# Altium PCB B202AA-PCIe.PcbDoc
Units mm, origin at the board's own origin, x right, y up, seen from the top; angles counter-clockwise.
Board outline 30 x 50.95 mm, 4 copper layers (Top Layer, Int1, Int2, Bottom Layer), stack 1.547 mm thick; 93 components, 58 nets, 313 pads, 104 vias.
Unrouted connection lines stored in the file: 238.
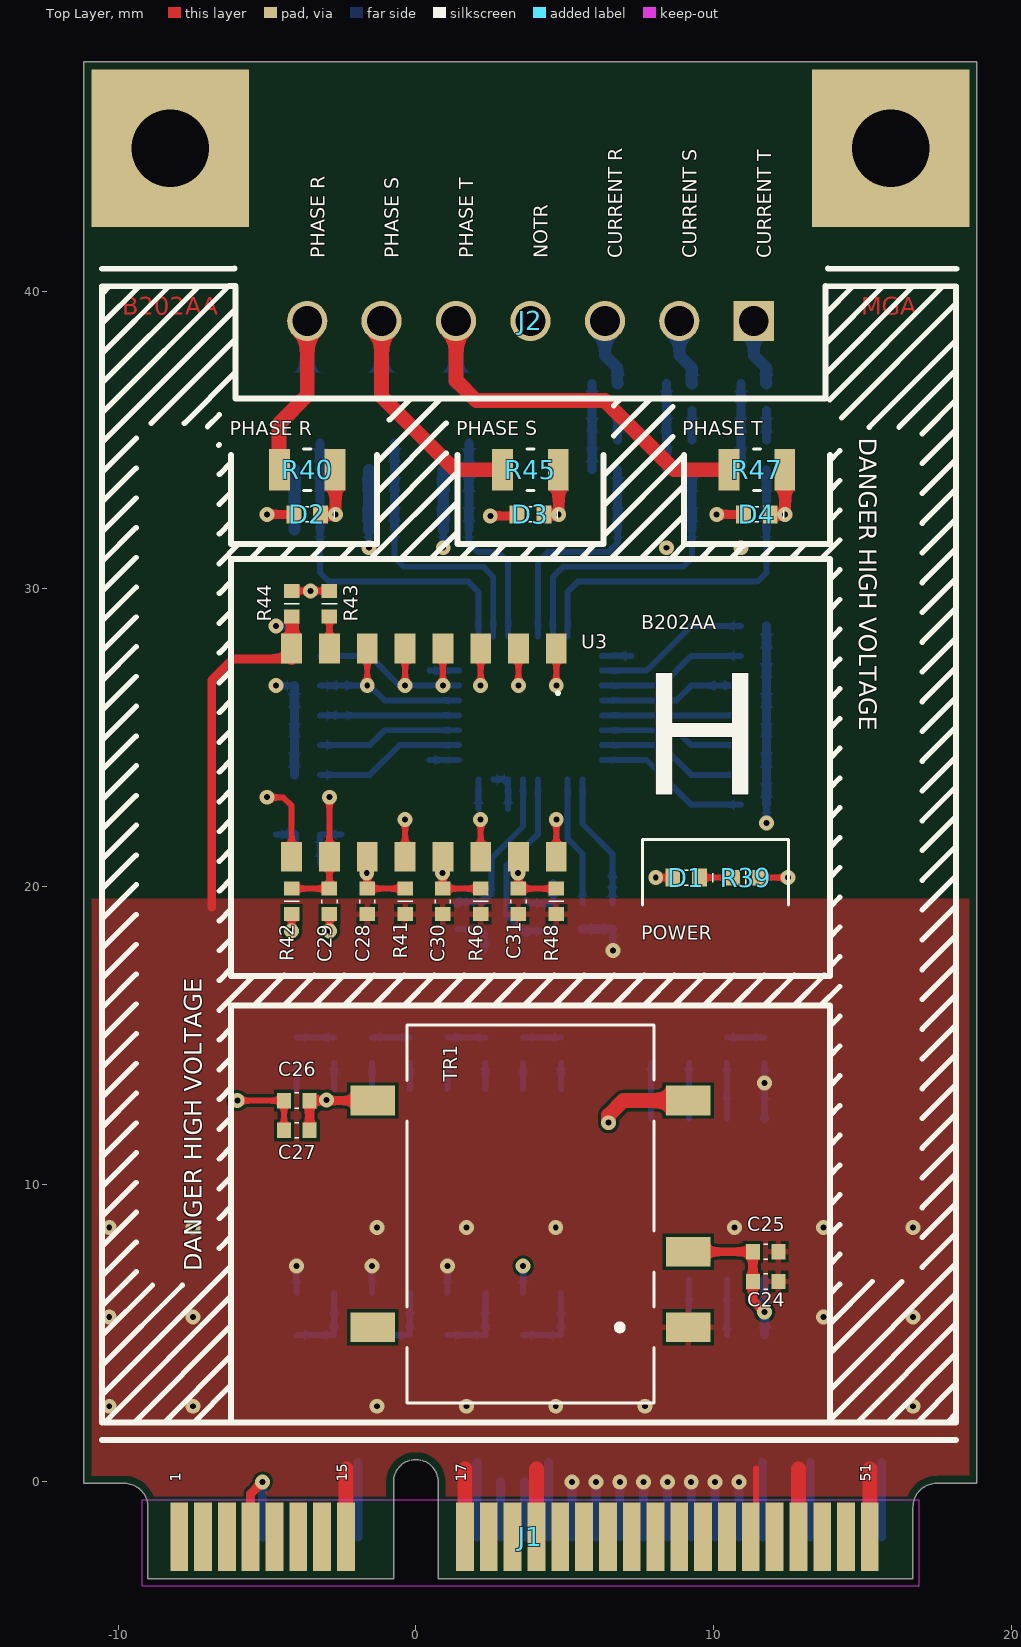
[diagram p0: Top Layer view]
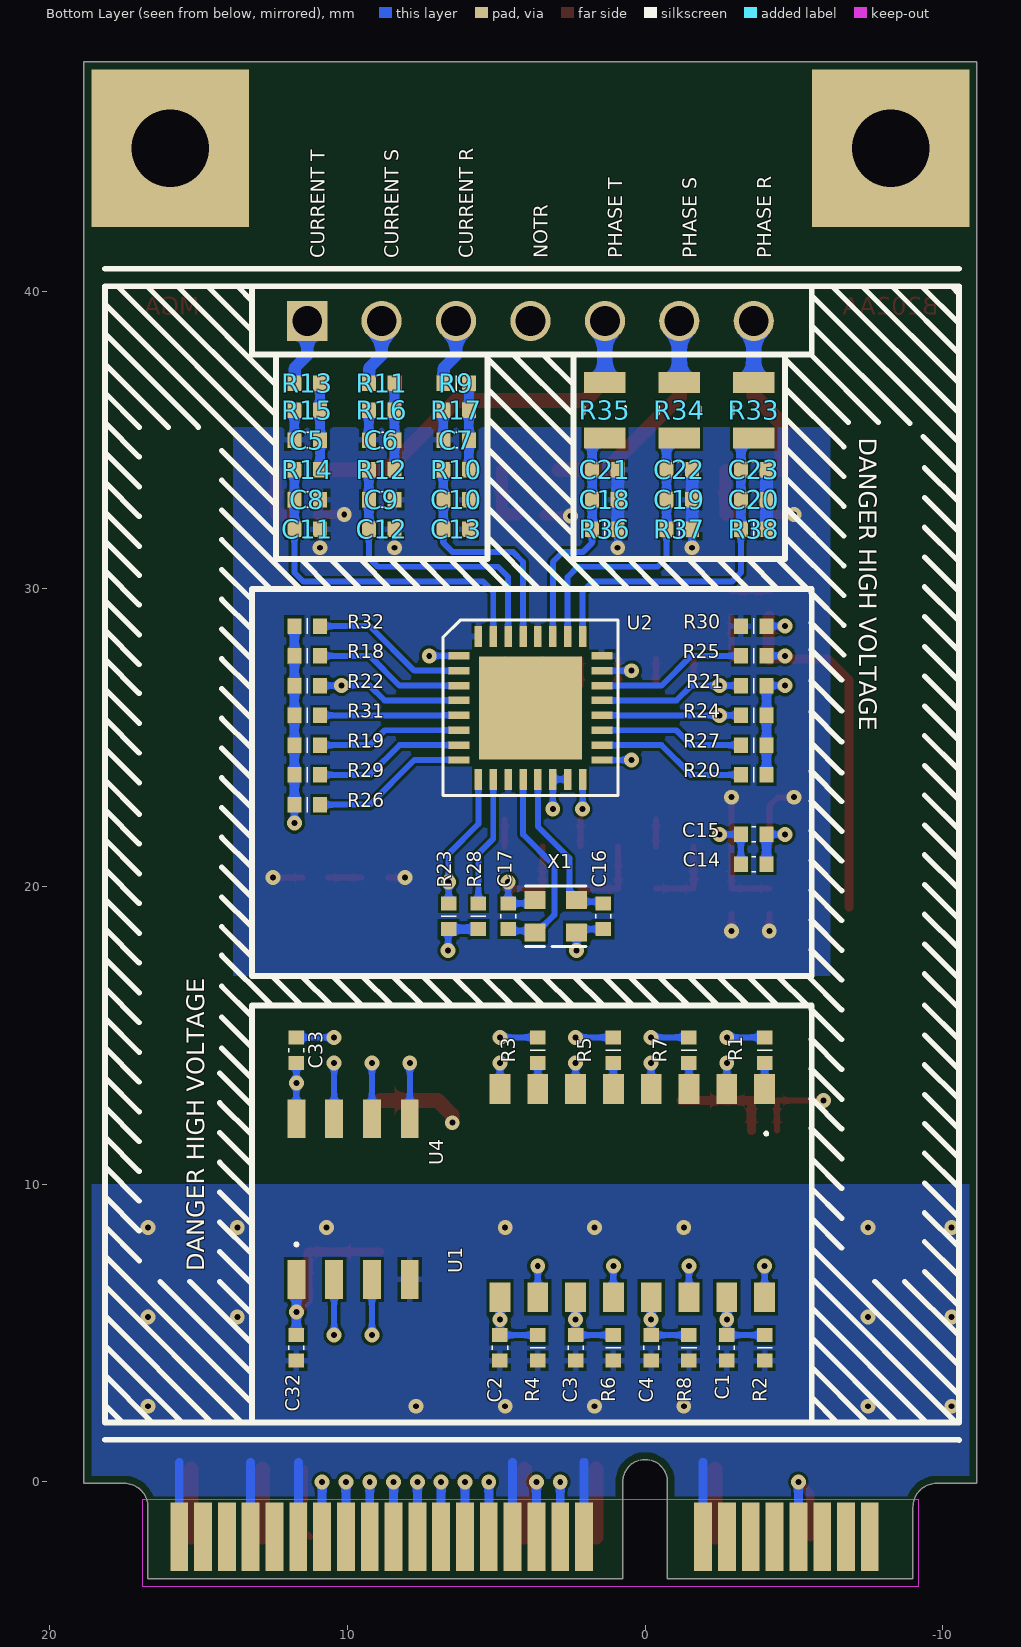
[diagram p1: Bottom Layer view, seen from below]
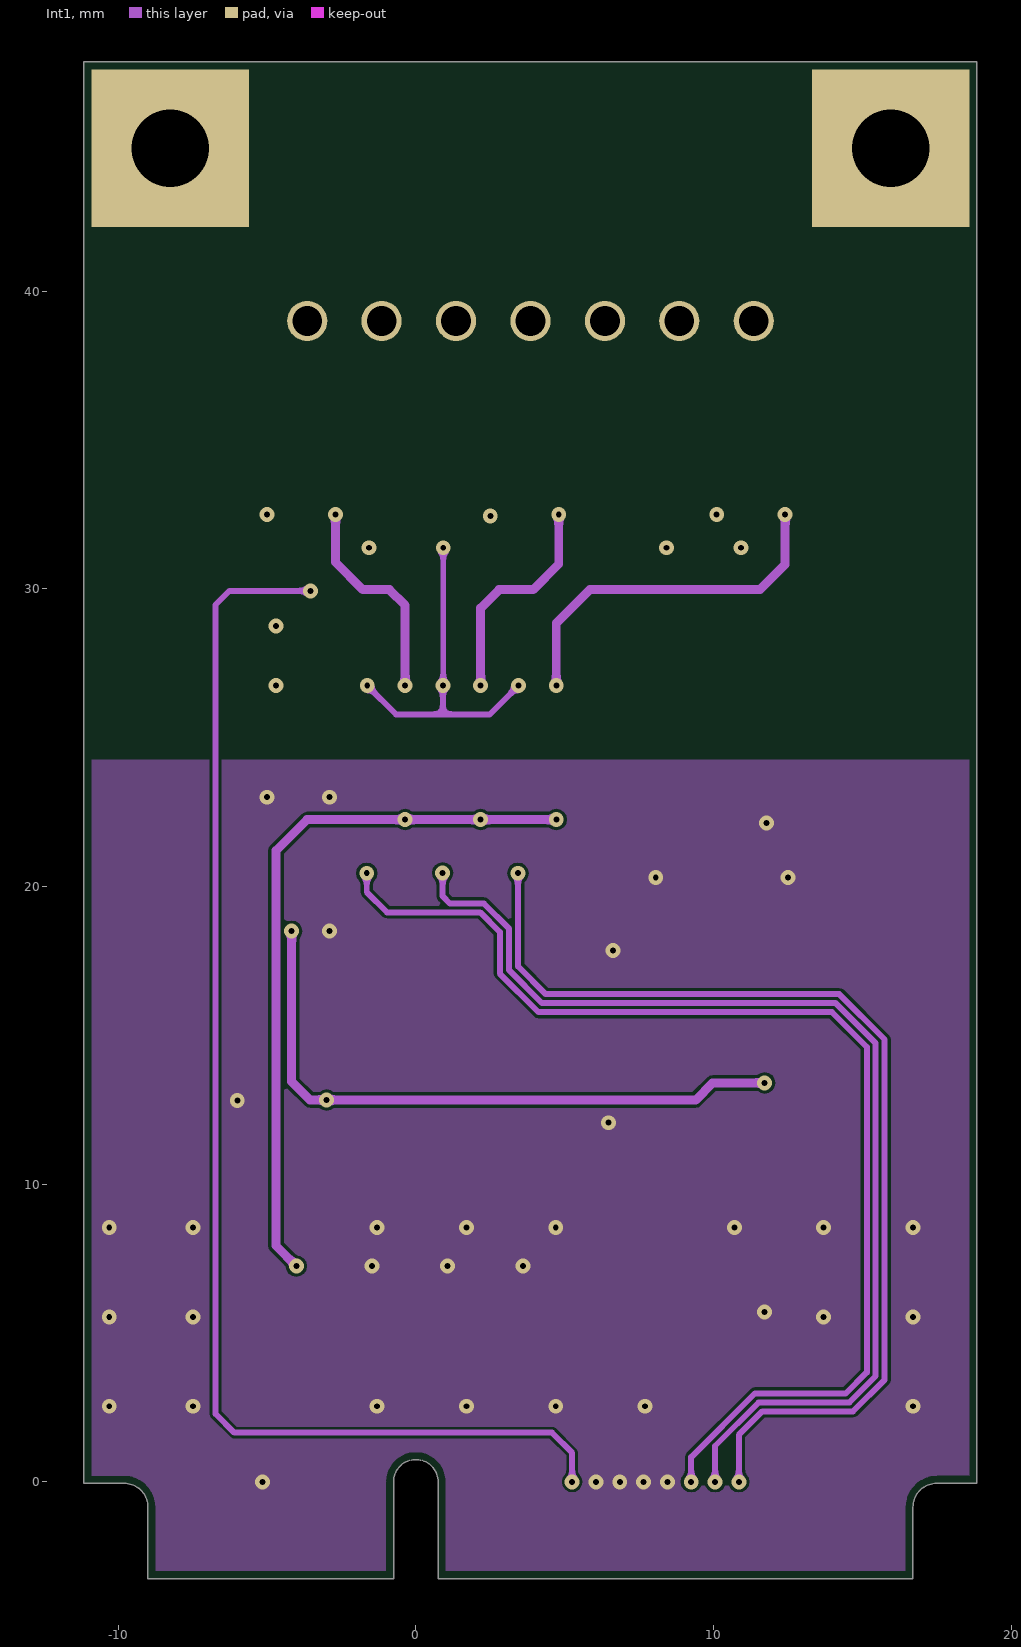
[diagram p2: Int1]
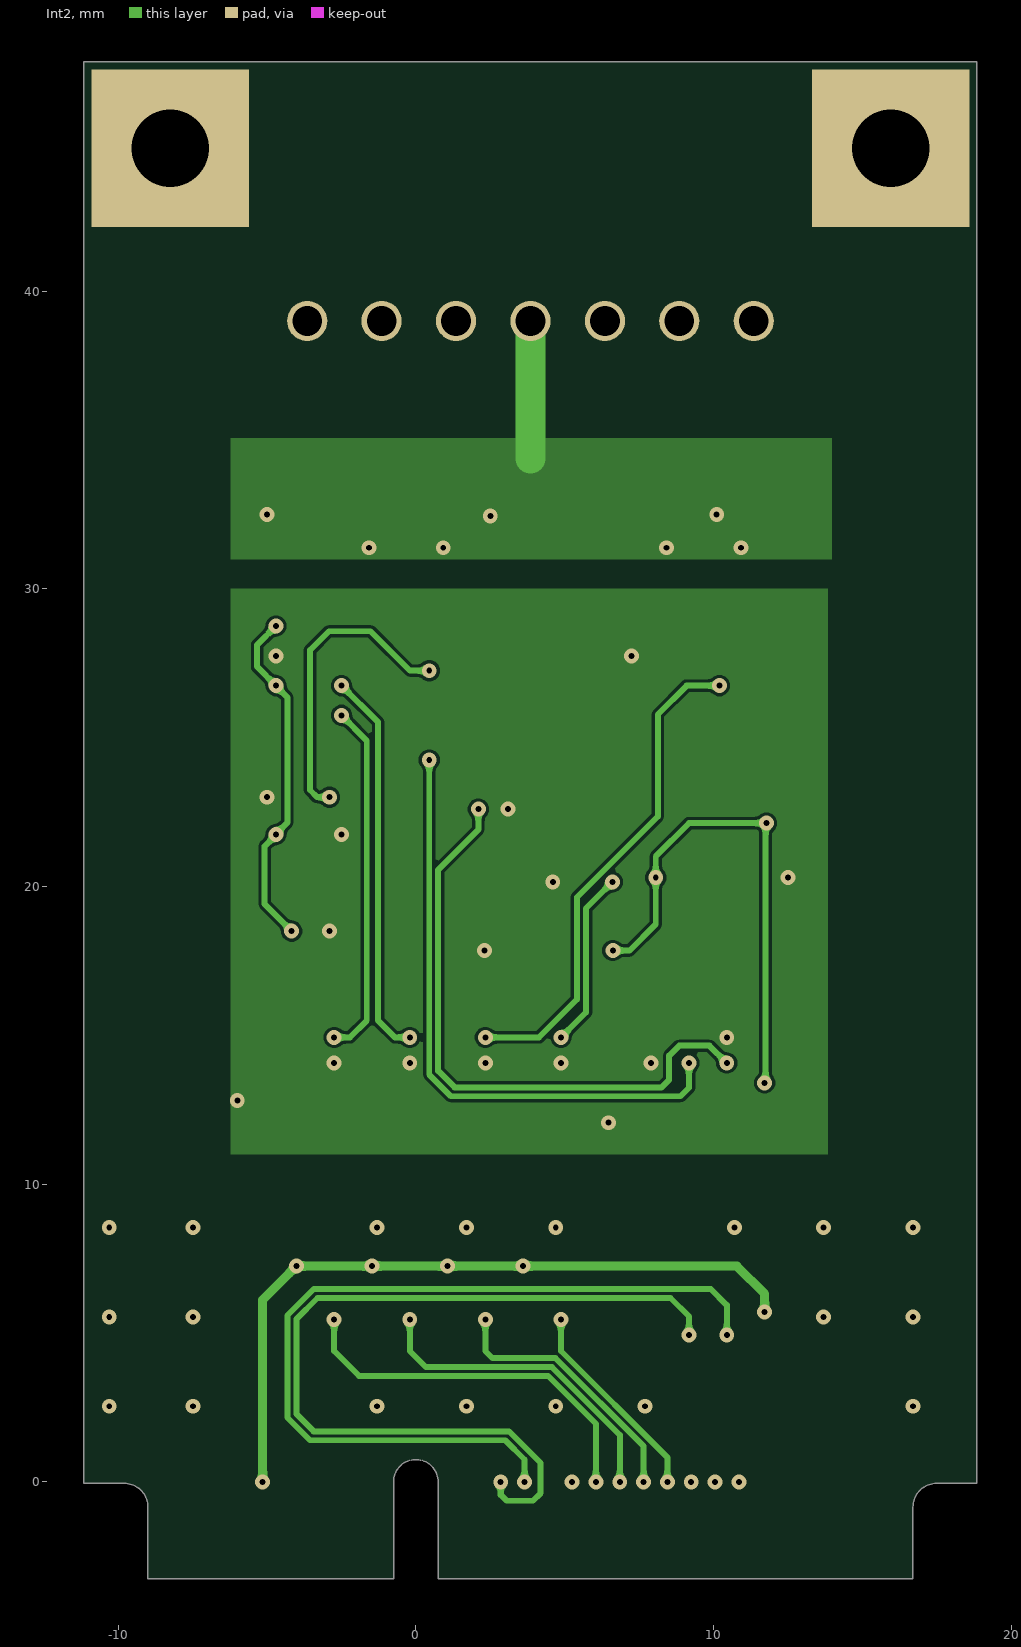
[diagram p3: Int2]
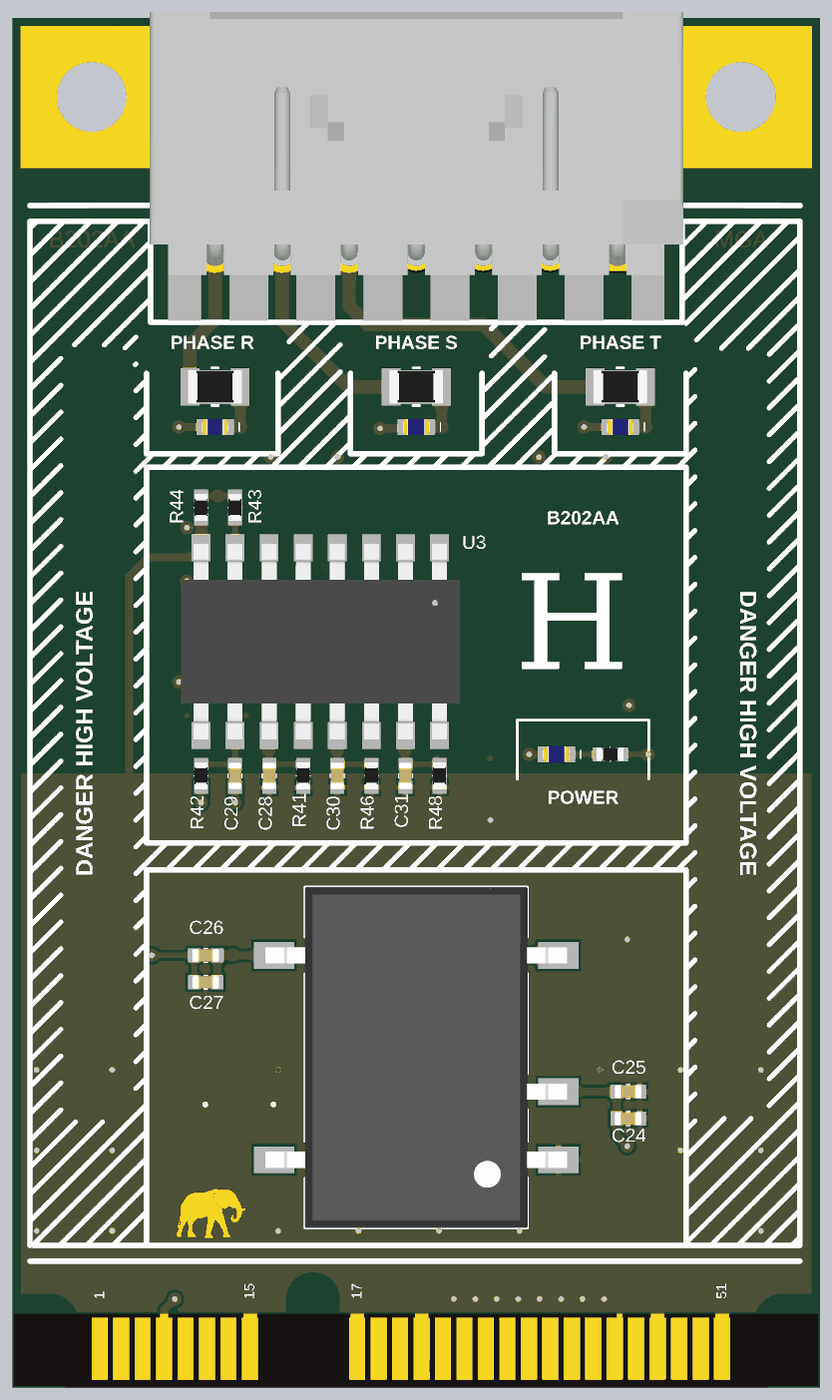
[diagram p4: 3D render of the assembled board from above, using the file's embedded part models]
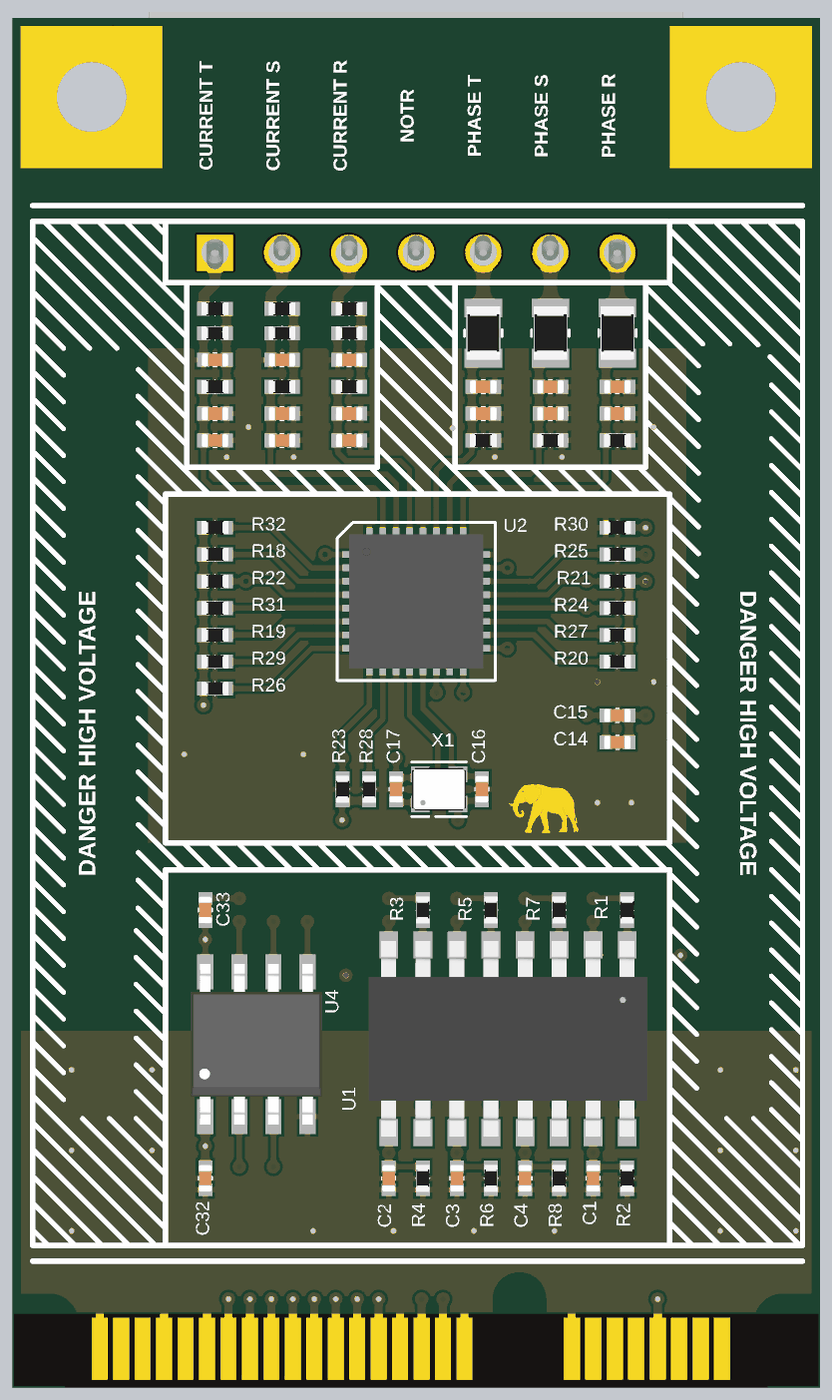
[diagram p5: 3D render of the assembled board from below, using the file's embedded part models]

## Layer stack, top to bottom
Top Solder: solder mask 0.0254, SM-001, Dk 4
Top Layer: signal copper 0.035
Dielectric 1: prepreg 0.2083, PP-022, Dk 4.5
Int1: signal copper 0.035
Dielectric 3: core 0.9906, Core-042, Dk 4.6
Int2: signal copper 0.035
Dielectric 5: prepreg 0.2083, PP-022, Dk 4.5
Bottom Layer: signal copper 0.035
Bottom Solder: solder mask 0.0254, SM-001, Dk 4

## Board outline
-9,-3.25 -9,-0.85 ccw(c-9.8,-0.85) -9.8,-0.05 -11.15,-0.05 -11.15,47.7 18.85,47.7 18.85,-0.05 17.5,-0.05 ccw(c17.5,-0.85) 16.7,-0.85 16.7,-3.25 0.75,-3.25 0.75,0 ccw(c0,0) -0.75,0 -0.75,-3.25

## Design rules (kind name [scope] priority, off if disabled: settings)
BoardOutlineClearance [All] p1: gap=0.25 ignorepadtopadclearanceinfootprint=FALSE except(0: Arc-SplitContinuation Track-SplitContinuation SMDPad-SplitContinuation THPad-SplitContinuation Via-SplitContinuation Fill-SplitContinuation Poly-SplitContinuation Region-SplitContinuation Text-SplitContinuation)
Clearance "HV Clearence" [InNetClass('HV')] p1: gap=0.1 ignorepadtopadclearanceinfootprint=TRUE except(0: Arc-Hole Track-Hole SMDPad-Hole THPad-Hole Via-Hole Fill-Hole Poly-Hole Region-Hole Text-Hole; 1: Arc-Arc Arc-Track Arc-Fill Arc-Poly Arc-Region Track-Track Track-Fill Track-Poly Track-Region)
Clearance Clearance-xPP-xTP-xTT [All] p2: gap=0.1 ignorepadtopadclearanceinfootprint=FALSE except(0: Arc-Hole Track-Hole SMDPad-Hole THPad-Hole Via-Hole Fill-Hole Poly-Hole Region-Hole Text-Hole)
ComponentClearance [All] p1: gap=0.25 collisioncheckmode=3 verticalgap=0.25 showdistances=FALSE
DiffPairsRouting [All] p1: maxlimit=0.25 minlimit=0.25 mostfreqgap=0.25 toplayer_minwidth=0.381 toplayer_maxwidth=0.381 toplayer_prefwidth=0.381 midlayer1_minwidth=0.381 midlayer1_maxwidth=0.381 midlayer1_prefwidth=0.381 midlayer2_minwidth=0.381 midlayer2_maxwidth=0.381 midlayer2_prefwidth=0.381 bottomlayer_minwidth=0.381 bottomlayer_maxwidth=0.381 bottomlayer_prefwidth=0.381 maxuncoupledlength=12.5
Height [All] p1: minheight=0 maxheight=25 prefheight=12.5
HoleSize HoleSize-PTH [All] p1: absolutevalues=TRUE maxlimit=5 minlimit=0.15 maxpercent=80.000 minpercent=20.000
HoleToHoleClearance [All] p1: gap=0.35 allowstackedmicrovias=TRUE
MinimumAnnularRing "Minimum IAR  <= 0.45mm" [((ObjectKind = 'Pad') OR (ObjectKind = 'Via')) And (Layer = 'MultiLayer') And (HoleDiameter <= AsMM(0.45))] p1: minimumring=0.125 // minimum inner annular ring for pads <= 0.45mm finished hole size
MinimumAnnularRing "Minimum IAR  > 0.45mm" [((ObjectKind = 'Pad') OR (ObjectKind = 'Via')) And (Layer = 'MultiLayer') And (HoleDiameter > AsMM(0.45))] p2: minimumring=0.125 // minimum inner annular ring for pads > 0.45mm finished hole size
MinimumAnnularRing Minimum-IAR [All] p3: minimumring=0.125
MinimumSolderMaskSliver [All] p1: minsoldermaskwidth=0.08
PlaneClearance [InNet('ANT_GSM')] p1: clearance=0.05
PlaneClearance PlaneClearance-IPI [All] p2: clearance=0.25
PlaneConnect [All] p1: planeconnectstyle=Relief reliefexpansion=0.175 reliefentries=4 reliefconductorwidth=0.2 reliefairgap=0.1
PolygonConnect PolygonConnect_Via [All vs (ObjectKind = 'Via') And (HoleDiameter <= AsMM(0.45))] p1: connectstyle=Direct reliefconductorwidth=0.254 reliefentries=4 polygonreliefangle="90 Angle" airgapwidth=0.254
PolygonConnect PolygonConnect-xTW [All] p2: connectstyle=Relief reliefconductorwidth=0.2 reliefentries=4 polygonreliefangle="90 Angle" airgapwidth=0.1
RoutingCorners [All] p1: cornerstyle=45-Degree minsetback=2.5 maxsetback=2.5
RoutingVias "RoutingVias <= 0.45mm" [(ObjectKind = 'Via') And (HoleDiameter <= AsMM(0.45))] p1: holewidth=0.2 width=0.55 viastyle="Through Hole" minholewidth=0.15 minwidth=0.5 maxholewidth=0.45 maxwidth=0.8
RoutingVias "RoutingVias > 0.45mm" [(ObjectKind = 'Via') And (HoleDiameter > AsMM(0.45))] p2: holewidth=0.5 width=0.85 viastyle="Through Hole" minholewidth=0.5 minwidth=0.85 maxholewidth=0.9 maxwidth=1.25
SilkToSilkClearance [All] p1: silktosilkclearance=0.2
SilkToSolderMaskClearance SilkscreenOverComponentPads [IsPad] p1: minsilkscreentomaskgap=0.1 clearancetoexposedcopper=TRUE
SolderMaskExpansion SolderMaskExpansion_Via [(ObjectKind = 'Via') And (HoleDiameter <= AsMM(0.45))] p1: expansion=0.01 istentingtop=TRUE soldermaskfromhole=TRUE
SolderMaskExpansion [All] p2: expansion=0.01 istentingtop=FALSE
SupplyNets VT [InNetClass('HV')] p1: voltage=220,0
SupplyNets 3V3 [InNet('3V3')] p2: voltage=3,000
SupplyNets 3V3ISO [InNet('3V3ISO')] p3: voltage=3,000
UnRoutedNet [All] p1: checkbadconnections=TRUE
Width Width-xTW [All] p1: maxlimit=1.5 minlimit=0.1 preferedwidth=0.2
18 further rules are at their usual default settings.

## Classes and differential pairs
component class "MAX78630 SOC": C14 C15 C16 C17 R18 R19 R20 R21 R22 R23 R24 R25 R26 R27 R28 R29 R30 R31 R32 U2 X1
net class HV: VR VS VT
component class "T Phase Sense Signal Isolator": C31 D4 R47 R48 U3
component class "S Phase Sense Signal Isolator": C30 D3 R45 R46
component class "R Phase Sense Signal Isolator": C28 D2 R40 R41
component class "Reset Signal Isolator": C29 R42 R43 R44
component class "AL5 Signal Isolator": C4 R7 R8
component class "AL4 Signal Isolator": C3 R5 R6
component class "AL2 Signal Isolator": C2 R3 R4
component class "AL1 Signal Isolator": C1 R1 R2 U1
component class "Serial Comm Isolation": C32 C33 U4
component class "Voltage Dividers": C18 C19 C20 C21 C22 C23 R33 R34 R35 R36 R37 R38
component class "DC/DC Isolation": C24 C25 C26 C27 D1 R39 TR1
component class "Current Voltage Dividers": C5 C6 C7 C8 C9 C10 C11 C12 C13 R9 R10 R11 R12 R13 R14 R15 R16 R17
component class "Card Edge Connector": J1
component class "3 Phase Inputs": J2

## Components (designator, comment, footprint, x,y, rotation, side; value= is the part's Value field where it differs from the comment)
C1 "Capacitor - 4.7uF [0402] (Ceramic)" CAPACITOR_0402 -2.745,4.5 r90 bottom value=4.7uF
C2 "Capacitor - 4.7uF [0402] (Ceramic)" CAPACITOR_0402 4.875,4.5 r90 bottom value=4.7uF
C3 "Capacitor - 4.7uF [0402] (Ceramic)" CAPACITOR_0402 2.335,4.5 r90 bottom value=4.7uF
C4 "Capacitor - 4.7uF [0402] (Ceramic)" CAPACITOR_0402 -0.205,4.5 r90 bottom value=4.7uF
C5 "Capacitor - 100nF [0402] (Ceramic)" CAPACITOR_0402 11.35,35 r180 bottom value=100nF
C6 "Capacitor - 100nF [0402] (Ceramic)" CAPACITOR_0402 8.85,35 r180 bottom value=100nF
C7 "Capacitor - 100nF [0402] (Ceramic)" CAPACITOR_0402 6.35,35 r180 bottom value=100nF
C8 "Capacitor - 47nF [0402] (Ceramic)" CAPACITOR_0402 11.35,33 r0 bottom value=47nF
C9 "Capacitor - 47nF [0402] (Ceramic)" CAPACITOR_0402 8.85,33 r0 bottom value=47nF
C10 "Capacitor - 47nF [0402] (Ceramic)" CAPACITOR_0402 6.35,33 r0 bottom value=47nF
C11 "Capacitor - 1nF [0402] (Ceramic)" CAPACITOR_0402 11.35,32 r0 bottom value=1nF
C12 "Capacitor - 1nF [0402] (Ceramic)" CAPACITOR_0402 8.85,32 r0 bottom value=1nF
C13 "Capacitor - 1nF [0402] (Ceramic)" CAPACITOR_0402 6.35,32 r0 bottom value=1nF
C14 "Capacitor - 100nF [0402] (Ceramic)" CAPACITOR_0402 -3.65,20.75 r180 bottom value=100nF
C15 "Capacitor - 100nF [0402] (Ceramic)" CAPACITOR_0402 -3.65,21.75 r180 bottom value=100nF
C16 "Capacitor - 8pF [0402] (Ceramic)" CAPACITOR_0402 1.4,19 r90 bottom value=8pF
C17 "Capacitor - 8pF [0402] (Ceramic)" CAPACITOR_0402 4.6,19 r270 bottom value=8pF
C18 "Capacitor - 100nF [0402] (Ceramic)" CAPACITOR_0402 1.35,33 r0 bottom value=100nF
C19 "Capacitor - 100nF [0402] (Ceramic)" CAPACITOR_0402 -1.15,33 r0 bottom value=100nF
C20 "Capacitor - 100nF [0402] (Ceramic)" CAPACITOR_0402 -3.65,33 r0 bottom value=100nF
C21 "Capacitor - 1nF [0402] (Ceramic)" CAPACITOR_0402 1.35,34 r0 bottom value=1nF
C22 "Capacitor - 1nF [0402] (Ceramic)" CAPACITOR_0402 -1.15,34 r0 bottom value=1nF
C23 "Capacitor - 1nF [0402] (Ceramic)" CAPACITOR_0402 -3.65,34 r0 bottom value=1nF
C24 "Capacitor - 100nF [0402] (Ceramic)" CAPACITOR_0402 11.75,6.73 r180 top value=100nF
C25 "Capacitor - 100nF [0402] (Ceramic)" CAPACITOR_0402 11.75,7.73 r180 top value=100nF
C26 "Capacitor - 100nF [0402] (Ceramic)" CAPACITOR_0402 -4,12.81 r0 top value=100nF
C27 "Capacitor - 4.7uF [0402] (Ceramic)" CAPACITOR_0402 -4,11.81 r0 top value=4.7uF
C28 "Capacitor - 4.7uF [0402] (Ceramic)" CAPACITOR_0402 -1.633,19.5 r90 top value=4.7uF
C29 "Capacitor - 100nF [0402] (Ceramic)" CAPACITOR_0402 -2.903,19.5 r90 top value=100nF
C30 "Capacitor - 4.7uF [0402] (Ceramic)" CAPACITOR_0402 0.907,19.5 r90 top value=4.7uF
C31 "Capacitor - 4.7uF [0402] (Ceramic)" CAPACITOR_0402 3.447,19.5 r90 top value=4.7uF
C32 "Capacitor - 100nF [0402] (Ceramic)" CAPACITOR_0402 11.715,4.5 r90 bottom value=100nF
C33 "Capacitor - 100nF [0402] (Ceramic)" CAPACITOR_0402 11.715,14.5 r270 bottom value=100nF
D1 "SMD LED (Red)" LED_0402 9.079,20.3 r180 top
D2 "SMD LED (Green)" LED_0402 -3.65,32.5 r180 top
D3 "SMD LED (Green)" LED_0402 3.85,32.5 r180 top
D4 "SMD LED (Green)" LED_0402 11.456,32.5 r180 top
J1 "Connector - Mini PCI-E (Male B202AA-PCIe)" "PCB - Mini PCI Express" 0,0 r0 top
J2 "53426-0710" "Connector 7P (2.54)" 3.85,39 r180 top locked
R1 "330R - 0402 - %1 - 1/16W" RESISTOR_0402 -4.015,14.5 r90 bottom value=330R
R2 "10K - 0402 - %1 - 1/16W" RESISTOR_0402 -4.015,4.5 r90 bottom value=10K
R3 "330R - 0402 - %1 - 1/16W" RESISTOR_0402 3.605,14.5 r90 bottom value=330R
R4 "10K - 0402 - %1 - 1/16W" RESISTOR_0402 3.605,4.5 r90 bottom value=10K
R5 "330R - 0402 - %1 - 1/16W" RESISTOR_0402 1.065,14.5 r90 bottom value=330R
R6 "10K - 0402 - %1 - 1/16W" RESISTOR_0402 1.065,4.5 r90 bottom value=10K
R7 "330R - 0402 - %1 - 1/16W" RESISTOR_0402 -1.475,14.5 r90 bottom value=330R
R8 "10K - 0402 - %1 - 1/16W" RESISTOR_0402 -1.475,4.5 r90 bottom value=10K
R9 "64R9 - 0402 - %1 - 1/16W" RESISTOR_0402 6.35,36.904 r0 bottom value=64R9
R10 "750R - 0402 - %1 - 1/16W" RESISTOR_0402 6.35,34 r180 bottom value=750R
R11 "64R9 - 0402 - %1 - 1/16W" RESISTOR_0402 8.85,36.904 r0 bottom value=64R9
R12 "750R - 0402 - %1 - 1/16W" RESISTOR_0402 8.85,34 r180 bottom value=750R
R13 "64R9 - 0402 - %1 - 1/16W" RESISTOR_0402 11.35,36.904 r0 bottom value=64R9
R14 "750R - 0402 - %1 - 1/16W" RESISTOR_0402 11.35,34 r180 bottom value=750R
R15 "34R8 - 0402 - %1 - 1/16W" RESISTOR_0402 11.35,36 r180 bottom value=34R8
R16 "34R8 - 0402 - %1 - 1/16W" RESISTOR_0402 8.85,36 r180 bottom value=34R8
R17 "34R8 - 0402 - %1 - 1/16W" RESISTOR_0402 6.35,36 r180 bottom value=34R8
R18 "10K - 0402 - %1 - 1/16W" RESISTOR_0402 11.35,27.75 r0 bottom value=10K
R19 "10K - 0402 - %1 - 1/16W" RESISTOR_0402 11.35,24.75 r0 bottom value=10K
R20 "10K - 0402 - %1 - 1/16W" RESISTOR_0402 -3.65,23.75 r180 bottom value=10K
R21 "10K - 0402 - %1 - 1/16W" RESISTOR_0402 -3.65,26.75 r180 bottom value=10K
R22 "10K - 0402 - %1 - 1/16W" RESISTOR_0402 11.35,26.75 r0 bottom value=10K
R23 "10K - 0402 - %1 - 1/16W" RESISTOR_0402 6.6,19 r270 bottom value=10K
R24 "10K - 0402 - %1 - 1/16W" RESISTOR_0402 -3.65,25.75 r180 bottom value=10K
R25 "10K - 0402 - %1 - 1/16W" RESISTOR_0402 -3.65,27.75 r0 bottom value=10K
R26 "10K - 0402 - %1 - 1/16W" RESISTOR_0402 11.35,22.75 r180 bottom locked value=10K
R27 "10K - 0402 - %1 - 1/16W" RESISTOR_0402 -3.65,24.75 r0 bottom locked value=10K
R28 "10K - 0402 - %1 - 1/16W" RESISTOR_0402 5.6,19 r90 bottom value=10K
R29 "10K - 0402 - %1 - 1/16W" RESISTOR_0402 11.35,23.75 r180 bottom locked value=10K
R30 "0R - 0402 - %1 - 1/16W" RESISTOR_0402 -3.65,28.75 r180 bottom value=0R
R31 "10K - 0402 - %1 - 1/16W" RESISTOR_0402 11.35,25.75 r180 bottom locked value=10K
R32 "10K - 0402 - %1 - 1/16W" RESISTOR_0402 11.35,28.75 r180 bottom locked value=10K
R33 "2M - 0805 - %5 - 1/8W" RESISTOR_0805 -3.65,36 r90 bottom value=2M
R34 "2M - 0805 - %5 - 1/8W" RESISTOR_0805 -1.15,36 r90 bottom value=2M
R35 "2M - 0805 - %5 - 1/8W" RESISTOR_0805 1.35,36 r90 bottom value=2M
R36 "750R - 0402 - %1 - 1/16W" RESISTOR_0402 1.35,32 r0 bottom value=750R
R37 "750R - 0402 - %1 - 1/16W" RESISTOR_0402 -1.15,32 r0 bottom value=750R
R38 "750R - 0402 - %1 - 1/16W" RESISTOR_0402 -3.65,32 r0 bottom value=750R
R39 "330R - 0402 - %1 - 1/16W" RESISTOR_0402 11.079,20.3 r180 top value=330R
R40 "220K - 0805 - %5 - 1/16W" RESISTOR_0805 -3.65,34 r180 top value=220K
R41 "47K - 0402 - %1 - 1/16W" RESISTOR_0402 -0.363,19.5 r90 top value=47K
R42 "10K - 0402 - %1 - 1/16W" RESISTOR_0402 -4.173,19.5 r270 top value=10K
R43 "330R - 0402 - %1 - 1/16W" RESISTOR_0402 -2.903,29.5 r90 top value=330R
R44 "47K - 0402 - %1 - 1/16W" RESISTOR_0402 -4.173,29.5 r90 top value=47K
R45 "220K - 0805 - %5 - 1/16W" RESISTOR_0805 3.85,34 r180 top value=220K
R46 "47K - 0402 - %1 - 1/16W" RESISTOR_0402 2.177,19.5 r90 top value=47K
R47 "220K - 0805 - %5 - 1/16W" RESISTOR_0805 11.456,34 r180 top value=220K
R48 "47K - 0402 - %1 - 1/16W" RESISTOR_0402 4.717,19.5 r90 top value=47K
TR1 "PDS1-S3-S3-M" PDS1-Sx-Sx-M 3.85,9 r180 top
U1 "TCMT4100" SO-16 0.43,9.7 r270 bottom
U2 "MAX78630+PPM/D00" "TQFN-32 - Maxim" 3.85,26 r270 bottom locked
U3 "TCMT4100" SO-16 0.272,24.5 r270 top
U4 "ISO7221ADR" "SOIC-8 Narrow" 9.81,9.5 r90 bottom
X1 "CX2016DB20000D0GPSC1" "CRYSTAL - 20MHz" 3,19 r90 bottom

## Footprints (in the part's own frame and the unit in brackets; to place one, negate y for a bottom-side part, rotate by r counter-clockwise, add the part's x,y. Pads: shape width x height; smd on the part's side, far side on the other; paste and mask are expansions set on the pad)
CAPACITOR_0402 [mm] "Chip Capacitor, IPC High Density"
  rect 0.47x0.52 smd mask+0.01: 1(-0.43,0) 2(0.43,0)
  silkscreen extent -0.06,-0.25 0.06,0.25, body extent -0.5,-0.25 0.5,0.25, height 0.49
"Connector 7P (2.54)" [mm] "7P Tunic Connector"
  rect 1.35x1.35 / inner round 1.35 / far side rect 1.35x1.35 hole 1 mask+0.076: 1(-7.5,0)
  round 1.35 hole 1 mask+0.076: 2(-5,0) 3(-2.5,0) 4(0,0) 5(2.5,0) 6(5,0) 7(7.5,0)
  body extent -9.96,-8.96 9.94,2.54, height 6.65
"CRYSTAL - 20MHz" [mm] "X2016DB20000D0FLJCC"
  rect 0.6x0.7 smd mask+0.01: 1(-0.55,0.7) 2(-0.55,-0.7) 3(0.55,-0.7) 4(0.55,0.7)
  silkscreen extent -1.02,-1.02 1.02,1.02, body extent -0.8,-1 0.8,1, height 0.4
LED_0402 [mm] "LED, IPC High Density"
  rect 0.5x0.6 smd mask+0.01: 1(-0.45,0) 2(0.45,0)
  silkscreen extent -0.9,-0.25 0.06,0.25, body extent -0.5,-0.3 0.5,0.3, height 0.18
"PCB - Mini PCI Express" [mm]
  rect 0.6x2.3 smd paste-0.9: 1(-7.95,-1.85) 3(-7.15,-1.85) 5(-6.35,-1.85) 7(-5.55,-1.85) 9(-4.75,-1.85) 11(-3.95,-1.85) 13(-3.15,-1.85) 15(-2.35,-1.85) 17(1.65,-1.85) 19(2.45,-1.85) 21(3.25,-1.85) 23(4.05,-1.85) 25(4.85,-1.85) 27(5.65,-1.85) 29(6.45,-1.85) 31(7.25,-1.85) 33(8.05,-1.85) 35(8.85,-1.85) 37(9.65,-1.85) 39(10.45,-1.85) 41(11.25,-1.85) 43(12.05,-1.85) 45(12.85,-1.85) 47(13.65,-1.85) 49(14.45,-1.85) 51(15.25,-1.85)
  rect 0.6x2.3 smd far side paste-0.9: 2(-7.55,-1.85) 4(-6.75,-1.85) 6(-5.95,-1.85) 8(-5.15,-1.85) 10(-4.35,-1.85) 12(-3.55,-1.85) 14(-2.75,-1.85) 16(-1.95,-1.85) 18(2.05,-1.85) 20(2.85,-1.85) 22(3.65,-1.85) 24(4.45,-1.85) 26(5.25,-1.85) 28(6.05,-1.85) 30(6.85,-1.85) 32(7.65,-1.85) 34(8.45,-1.85) 36(9.25,-1.85) 38(10.05,-1.85) 40(10.85,-1.85) 42(11.65,-1.85) 44(12.45,-1.85) 46(13.25,-1.85) 48(14.05,-1.85) 50(14.85,-1.85) 52(15.65,-1.85)
  Top Layer keep-out region: -9.2,-0.6 16.9,-0.6 16.9,-3.5 -9.2,-3.5
  Bottom Layer keep-out region: -9.2,-0.6 16.9,-0.6 16.9,-3.5 -9.2,-3.5
PDS1-Sx-Sx-M [mm] "Voltage Isolator"
  rect 1.5x1 smd mask+0.01: 1(-5.3,3.81) 2(-5.3,1.27) 4(-5.3,-3.81) 5(5.3,-3.81) 8(5.3,3.81)
  silkscreen extent -4.15,-6.35 4.15,6.35, body extent -5.62,-6.35 5.62,6.35, height 7.3
RESISTOR_0402 [mm] "Chip Resistor, IPC High Density"
  rect 0.47x0.52 smd mask+0.01: 1(-0.43,0) 2(0.43,0)
  silkscreen extent 0,-0.25 0,0.25, body extent -0.5,-0.25 0.5,0.25, height 0.35
RESISTOR_0805 [mm] "Chip Resistor, IPC High Density"
  rect 0.7x1.4 smd mask+0.01: 1(-0.935,0) 2(0.935,0)
  silkscreen extent -0.12,-0.7 0.12,0.7, body extent -1,-0.63 1,0.63, height 0.45
SO-16 [mm]
  rect 1x0.7 smd mask+0.01: 1(-3.5,4.445) 2(-3.5,3.175) 3(-3.5,1.905) 4(-3.5,0.635) 5(-3.5,-0.635) 6(-3.5,-1.905) 7(-3.5,-3.175) 8(-3.5,-4.445) 9(3.5,-4.445) 10(3.5,-3.175) 11(3.5,-1.905) 12(3.5,-0.635) 13(3.5,0.635) 14(3.5,1.905) 15(3.5,3.175) 16(3.5,4.445)
  silkscreen extent -2.05,4.45 -1.95,4.55, body extent -3.64,-5.19 3.64,5.19, height 2.11
"SOIC-8 Narrow" [mm]
  rect 1.3x0.6 smd mask+0.01: 1(-2.7,1.905) 2(-2.7,0.635) 3(-2.7,-0.635) 4(-2.7,-1.905) 5(2.7,-1.905) 6(2.7,-0.635) 7(2.7,0.635) 8(2.7,1.905)
  silkscreen extent -1.57,1.86 -1.47,1.95, body extent -2.99,-2.45 2.99,2.45, height 1.35
"TQFN-32 - Maxim" [mm]
  rect 0.25x0.7 smd mask+0.01: 1(-1.75,-2.4) 2(-1.25,-2.4) 3(-0.75,-2.4) 4(-0.25,-2.4) 5(0.25,-2.4) 6(0.75,-2.4) 7(1.25,-2.4) 8(1.75,-2.4) 17(1.75,2.4) 18(1.25,2.4) 19(0.75,2.4) 20(0.25,2.4) 21(-0.25,2.4) 22(-0.75,2.4) 23(-1.25,2.4) 24(-1.75,2.4)
  rect 0.7x0.25 smd mask+0.01: 9(2.4,-1.75) 10(2.4,-1.25) 11(2.4,-0.75) 12(2.4,-0.25) 13(2.4,0.25) 14(2.4,0.75) 15(2.4,1.25) 16(2.4,1.75) 25(-2.4,1.75) 26(-2.4,1.25) 27(-2.4,0.75) 28(-2.4,0.25) 29(-2.4,-0.25) 30(-2.4,-0.75) 31(-2.4,-1.25) 32(-2.4,-1.75)
  rect 3.45x3.45 smd mask+0.01: EP(0,0)
  silkscreen extent -2.95,-2.95 2.95,2.95, body extent -2.5,-2.5 2.5,2.5, height 0.9

## Part data
C1 C2 C3 C4 C27 C28 C30 C31: library part "Capacitor - 4.7uF [0402-6V3]", "Multilayer Ceramic Capacitors - SMD - 6V3 4.7uF X5R 0402 20%", Case=0402, Manufacturer Name=KEMET, Manufacturer Part Number=C0402C475M9PACTU, Tolerance=20%, Voltage=6V3
C5 C6 C7 C14 C15 C18 C19 C20 C24 C25 C26 C29 C32 C33: library part "Capacitor - 100nF [0402-6V3]", "Capacitor - 100nF [0402-6V3] (Ceramic)", Case=0402, Manufacturer Name=AVX, Manufacturer Part Number=04026D104KAT4A, Tolerance=%10, Voltage=6V3, ComponentLink1Description=Mouser, ComponentLink1URL=https://www.mouser.com.tr/ProductDetail/AVX/04026D104KAT4A?qs=sGAEpiMZZMs0AnBnWHyRQPg4iYkCw7IMED%2F4kpqgf7w%3D, ComponentLink2Description=DataSheet, ComponentLink2URL=https://www.mouser.com.tr/datasheet/2/40/cx5r-776519.pdf
C8 C9 C10: library part "Capacitor - 47nF [0402-6V3]", "Multilayer Ceramic Capacitors - SMD - 6.3V 47nF X7R 0402 10%", Case=0402, Manufacturer Name=AVX, Manufacturer Part Number=04026C473KAT2A, Tolerance=10%, Voltage=6V3
C11 C12 C13 C21 C22 C23: library part "Capacitor - 1nF [0402-6V3]", Case=0402, Manufacturer Name=AVX, Manufacturer Part Number=04026C102MAT2A, Tolerance=20%, Voltage=6V3, ComponentLink1Description=DataSheet, ComponentLink1URL=https://www.mouser.com.tr/datasheet/2/40/X7RDielectric-777024.pdf
C16 C17: library part "Capacitor - 8pF [0402-50V]", Case=0402, Manufacturer Name="KYOCERA AVX", Manufacturer Part Number=04025A8R0CAT2A, Tolerance=0.25pF, Voltage=50V
D1: library part "Diode - LED (0402-Red)", "Standard LEDs - SMD MINI-MOLD ULTRA COMPACT RED", Case=0402, Color=Red, Manufacturer Name="ROHM Semiconductor", Manufacturer Part Number=SML-P12VTT86R, ComponentLink1Description=DataSheet, ComponentLink1URL=https://www.mouser.com.tr/datasheet/2/348/sml-p1-e-1139198.pdf, ComponentLink2Description=Mouser, ComponentLink2URL=https://www.mouser.com.tr/ProductDetail/ROHM-Semiconductor/SML-P12U2TT86R?qs=sGAEpiMZZMseGfSY3csMkRIBDsfU3UCXJTULB5gem9Ta%252Bp%252BvZ709fg%3D%3D, ROHS=Yes
D2 D3 D4: library part "Diode - LED (0402-Green)", "Standard LEDs - SMD MINI-MOLD ULTRA COMPACT GREEN", Case=0402, Color=Green, Manufacturer Name="ROHM Semiconductor", Manufacturer Part Number=SML-P12MTT86R, ComponentLink1Description=DataSheet, ComponentLink1URL=https://www.mouser.com.tr/datasheet/2/348/sml-p1-e-1139198.pdf, ComponentLink2Description=Mouser, ComponentLink2URL=https://www.mouser.com.tr/ProductDetail/ROHM-Semiconductor/SML-P12U2TT86R?qs=sGAEpiMZZMseGfSY3csMkRIBDsfU3UCXJTULB5gem9Ta%252Bp%252BvZ709fg%3D%3D, ROHS=Yes
J1: "Mini PCI-Express gold finger connector.", BUS Type="Mini PCI Express", Mating Connector="TE 2041262-1", Number of Positions=52, Pitch="0.8 mm", System=Connector
J2: library part "Connector - Tunic 7P (2.5)", "2.50mm Pitch Mini-Lock Wire-to-Board Header Right Angle Friction and Positive Lock 7 Circuits", Case=TH, Manufacturer Name=Molex, Manufacturer Part Number=53426-0710, Pitch=2.5mm, Position="7 Position", System=Connector
R1 R3 R5 R7 R39 R43: library part "Resistor - 330R [0402]", "Thick Film Resistors - SMD 1/16 W 330 Ohm 1%", Case=0402, Manufacturer Name=Vishay, Manufacturer Part Number=CRCW0402330RFKED, Power=1/16W, Tolerance=%1, ComponentLink1Description=DataSheet, ComponentLink1URL=https://www.mouser.com.tr/datasheet/2/427/dcrcwe3-1762152.pdf, ComponentLink2Description=Mouser, ComponentLink2URL=https://www.mouser.com.tr/ProductDetail/Vishay-Dale/CRCW0402330RFKED?qs=sGAEpiMZZMu61qfTUdNhG2DpbjADlD3GGS6SwBlLi5Q%3D
R2 R4 R6 R8 R18 R19 R20 R21 R22 R23 R24 R25 R26 R27 R28 R29 R31 R32 R42: library part "Resistor - 10K [0402]", "Thick Film Resistors - SMD 1/16 W 10 KOhm 1%", Case=0402, Manufacturer Name=Vishay, Manufacturer Part Number=CRCW040210K0FKED, Power=1/16W, Tolerance=%1, ComponentLink1Description=DataSheet, ComponentLink1URL=https://www.mouser.com.tr/datasheet/2/427/dcrcwe3-1762152.pdf, ComponentLink2Description=Mouser, ComponentLink2URL=https://www.mouser.com.tr/ProductDetail/Vishay-Dale/CRCW040210K0FKED?qs=sGAEpiMZZMu61qfTUdNhG2DpbjADlD3GcalbOv9utCY%3D
R9 R11 R13: library part "Resistor - 64R9 [0402]", "Thick Film Resistors - SMD 1/16 W 64,9 Ohm 1%", Case=0402, Manufacturer Name=Vishay, Manufacturer Part Number=CRCW040264R9FKED, Power=1/16W, Tolerance=%1, ComponentLink1Description=DataSheet, ComponentLink1URL=https://www.mouser.com.tr/datasheet/2/427/dcrcwe3-1762152.pdf, ComponentLink2Description=Mouser, ComponentLink2URL=https://www.mouser.com.tr/ProductDetail/Vishay-Dale/CRCW0402330RFKED?qs=sGAEpiMZZMu61qfTUdNhG2DpbjADlD3GGS6SwBlLi5Q%3D
R10 R12 R14 R36 R37 R38: library part "Resistor - 750R [0402]", "Thick Film Resistors - SMD 1/16 W 750 Ohm 1%", Case=0402, Manufacturer Name=Vishay, Manufacturer Part Number=CRCW0402750RFKED, Power=1/16W, Tolerance=%1, ComponentLink1Description=DataSheet, ComponentLink1URL=https://www.mouser.com.tr/datasheet/2/427/dcrcwe3-1762152.pdf, ComponentLink2Description=Mouser, ComponentLink2URL=https://www.mouser.com.tr/ProductDetail/Vishay-Dale/CRCW0402330RFKED?qs=sGAEpiMZZMu61qfTUdNhG2DpbjADlD3GGS6SwBlLi5Q%3D
R15 R16 R17: library part "Resistor - 34R8 [0402]", "Thick Film Resistors - SMD 1/16 W 34,8 Ohm 1%", Case=0402, Manufacturer Name=Vishay, Manufacturer Part Number=CRCW040234R8FKED, Power=1/16W, Tolerance=%1, ComponentLink1Description=DataSheet, ComponentLink1URL=https://www.mouser.com.tr/datasheet/2/427/dcrcwe3-1762152.pdf, ComponentLink2Description=Mouser, ComponentLink2URL=https://www.mouser.com.tr/ProductDetail/Vishay-Dale/CRCW0402330RFKED?qs=sGAEpiMZZMu61qfTUdNhG2DpbjADlD3GGS6SwBlLi5Q%3D
R30: library part "Resistor - 0R [0402]", "Thick Film Resistors - SMD 1/16 W 0 Ohm", Case=0402, Manufacturer Name=Vishay, Manufacturer Part Number=CRCW04020000Z0ED, Power=1/16W, ComponentLink1Description=DataSheet, ComponentLink1URL=https://www.mouser.com.tr/datasheet/2/427/dcrcwe3-1762152.pdf, ComponentLink2Description=Mouser, ComponentLink2URL=https://www.mouser.com.tr/ProductDetail/Vishay-Dale/CRCW04020000Z0ED?qs=sGAEpiMZZMu61qfTUdNhG2DpbjADlD3GG34cJb50zyg%3D
R33 R34 R35: library part "Resistor - 2M [0805]", "Thick Film Resistors - SMD 1/2 W 220 KOhm 5%", Case=0805, Manufacturer Name=Vishay, Manufacturer Part Number=CRCW08052M00JNEA, Power=1/8W, Tolerance=%5, ComponentLink1Description=DataSheet, ComponentLink1URL=https://www.mouser.com.tr/datasheet/2/427/dcrcwe3-1762152.pdf, ComponentLink2Description=Mouser, ComponentLink2URL=https://www.mouser.com.tr/ProductDetail/Vishay-Dale/CRCW0402330RFKED?qs=sGAEpiMZZMu61qfTUdNhG2DpbjADlD3GGS6SwBlLi5Q%3D
R40 R45 R47: library part "Resistor - 220K [0805]", "Thick Film Resistors - SMD 1/2 W 220 KOhm 5%", Case=0805, Manufacturer Name="Vishay Dale", Manufacturer Part Number=CRCW0805220KJNEAHP, Power=1/2W, Tolerance=%5, ComponentLink1Description=DataSheet, ComponentLink1URL=https://www.mouser.com.tr/datasheet/2/427/dcrcwe3-1762152.pdf, ComponentLink2Description=Mouser, ComponentLink2URL=https://www.mouser.com.tr/ProductDetail/Vishay-Dale/CRCW0402330RFKED?qs=sGAEpiMZZMu61qfTUdNhG2DpbjADlD3GGS6SwBlLi5Q%3D
R41 R44 R46 R48: library part "Resistor - 47K [0402]", "Thick Film Resistors - SMD 1/16 W 47 KOhm 1%", Case=0402, Manufacturer Name=Vishay, Manufacturer Part Number=CRCW040247K0FKED, Power=1/16W, Tolerance=%1, ComponentLink1Description=DataSheet, ComponentLink1URL=https://www.mouser.com.tr/datasheet/2/427/dcrcwe3-1762152.pdf, ComponentLink2Description=Mouser, ComponentLink2URL=https://www.mouser.com.tr/ProductDetail/Vishay-Dale/CRCW040247K0FKED?qs=sGAEpiMZZMu61qfTUdNhG2DpbjADlD3GL%252B3h1elTxqU%3D
TR1: library part "Transformator - PDS1-Sx-Sx-M", "Module DC-DC 3.3VIN 1-OUT 3.3V 0.303A 1W 5-Pin SMD Module", Case=SMD, Manufacturer Name="CUI Inc.", Output Current="303 mA", Output Voltage=3V3, Manufacturer Part Number=PDS1-S3-S3-M
U1 U3: library part "IC - TCMT4100", "OptpCoupler 4CH 16 Pin (SOP16)", Case=SOP-16, Manufacturer Name="Vishay Semiconductors", Maximum Collector Emitter Saturation Voltage="0.3 V", Vf - Forward Voltage="1.6 V", If - Forward Current="60 mA", Manufacturer Part Number=TCMT4100, Number of Channels="4 Channel"
U2: library part "IC - MAX78630", "Energy Measurement Processor 32-Pin TQFN EP Tube", Case=TQFN-32, Manufacturer Name=Silergy, Manufacturer Part Number=MAX78630+PPM/D00, ROHS=Yes
U4: library part "IC - ISO7221ADR", "Dual-channel, TTL, 1/1, 1-Mbps digital isolator 8-SOIC -40 to 125", Case=SOIC-8, Manufacturer Name="Texas Instruments", Supply Voltage - Max="5 V", Supply Voltage - Min="3.3 V", Isolation Voltage="2500 Vrms", Manufacturer Part Number=ISO7221ADR
X1: library part "Crystal - 20MHz", "Crystals AEC-Q200 20000kHz 8pF 2x1.6mm", Case=SMD, Frequency="20 MHz", Manufacturer Name="Kyocera Electronic Components", Manufacturer Part Number=CX2016DB20000D0GPSC1

## Free pads (board coordinates)
  rect 5.3x5.3 hole 2.6: 1(-8.25,44.8) 2(15.95,44.8)

## Via types
v1: diameter 0.5, hole 0.2, Top Layer to Bottom Layer, tented both sides, 53 vias
v2: diameter 0.5, hole 0.2, Int2 to Bottom Layer, tented both sides, 34 vias
v3: diameter 0.5, hole 0.2, Top Layer to Int1, tented both sides, 17 vias

## Nets (pads, with @x,y where several pads share a name; then routed paths per layer and width w, separated by ;. In a path a pad name is that pad's centre, name@x,y a point inside that pad or via, vN(x,y) a via of type N, cw(c..) or ccw(c..) an arc to the next point about the centre after c; other vN are vias at no path point)
3V3: C24.2 C25.2 C32.2 J1.7 J1.8 TR1.2 U1.10 U1.12 U1.14 U1.16 U3.12 U3.14 U3.16 U4.1 | length 65.2
  Top Layer w0.2: U3.12@-0.363,21.35 v3(-0.363,22.25) ; U3.14@2.177,21.35 v3(2.177,22.25) ; U3.16@4.717,21.35 v3(4.717,22.25)
  Top Layer w0.3: J1.7 -5.55,-0.4 v1(-5.15,0) ; TR1.2@8.9,7.73 C25.2 C24.2 11.32,6.095 v1(11.715,5.7)
  Int1 w0.3: v1(-4.015,7.25) -4.699,7.934 -4.699,21.209 -3.658,22.25 v3(-0.363,22.25) v3(2.177,22.25) v3(4.717,22.25)
  Int2 w0.3: v1(-5.15,0) -5.15,6.115 v1(-4.015,7.25) v1(-1.475,7.25) v1(1.065,7.25) v1(3.605,7.25) 10.784,7.25 11.715,6.319 v1(11.715,5.7)
  Bottom Layer w0.2: U1.16@-4.015,6.35 v1(-4.015,7.25) ; U1.14@-1.475,6.35 v1(-1.475,7.25) ; U1.12@1.065,6.35 v1(1.065,7.25) ; U1.10@3.605,6.35 v1(3.605,7.25)
  Bottom Layer w0.3: J1.8 v1(-5.15,0) ; C32.2 v1(11.715,5.7) U4.1
3V3_UART_RX: J1.20 U4.3 | length 33.1
  Int2 w0.2: v2(2.85,0) 2.85,-0.437 3.048,-0.635 3.937,-0.635 4.191,-0.381 4.191,0.635 3.129,1.697 -3.432,1.697 -4.018,2.283 -4.018,5.464 -3.305,6.177 8.555,6.177 9.175,5.557 v2(9.175,4.93)
  Bottom Layer w0.2: v2(9.175,4.93) U4.3
  Bottom Layer w0.3: J1.20 v2(2.85,0)
3V3_UART_TX: J1.22 U4.2 | length 32.8
  Int2 w0.2: v2(3.65,0) 3.65,0.752 3.005,1.397 -3.556,1.397 -4.318,2.159 -4.318,5.588 -3.429,6.477 9.906,6.477 10.445,5.938 v2(10.445,4.93)
  Bottom Layer w0.2: v2(10.445,4.93) U4.2
  Bottom Layer w0.3: J1.22 v2(3.65,0)
3V3ISO: C14.2 C15.2 C26.2 C27.2 C33.2 D1.2 R18.2 R19.2 R20.2 R21.2 R22.2 R23.2 R24.2 R26.1 R27.1 R28.1 R29.1 R30.2 R31.1 R32.1 R42.2 TR1.5 U4.8 | length 70.7
  Top Layer w0.2: v1(-4.173,18.5) R42.2 ; v1(8.059,20.3) D1.2
  Top Layer w0.3: C27.2 C26.2 TR1.5@-1.2,12.81
  Int1 w0.3: v1(-4.173,18.5) -4.173,13.444 -3.556,12.827 9.398,12.827 9.971,13.4 v1(11.715,13.4)
  Int2 w0.2: v1(-4.7,28.75) -5.334,28.116 -5.334,27.384 v1(-4.7,26.75) -4.7,26.736 -4.318,26.354 -4.318,22.146 -4.7,21.764 v2(-4.7,21.75) -4.7,21.732 -5.08,21.352 -5.08,19.407 v1(-4.173,18.5) ; v1(6.616,17.85) 7.182,17.85 8.059,18.727 v1(8.059,20.3) 8.059,21.013 9.176,22.13 v1(11.78,22.13) 11.747,22.097 11.747,13.433 v1(11.715,13.4)
  Bottom Layer w0.2: v2(-4.7,21.75) C15.2 ; v1(-4.7,26.75) R21.2 ; v1(-4.7,28.75) R30.2 ; v1(6.616,17.85) R23.2@6.616,18.57 ; U4.8 v1(11.715,13.4) C33.2 ; v1(11.78,22.13) R26.1
  Bottom Layer w0.3: C14.2 C15.2 ; R20.2 R24.2 R21.2 ; R28.1 R23.2 ; R26.1 R29.1 R31.1 R32.1
  other v3: -3,12.827
ADDR0: R20.1 U2.18 | length 5.1
  Bottom Layer w0.2: R20.1 -1.55,23.75 -0.55,24.75 U2.18
ADDR1: R19.1 U2.6 | length 4.9
  Bottom Layer w0.2: U2.6 8.75,25.25 9.25,24.75 R19.1
AL1: C1.2 J1.28 R2.2 U1.15 | length 17.4
  Int2 w0.2: v2(-2.745,5.45) -2.745,4.396 -1.905,3.556 4.442,3.556 6.05,1.948 v1(6.05,0)
  Bottom Layer w0.2: R2.2 C1.2 v2(-2.745,5.45) U1.15@-2.745,6.35
  Bottom Layer w0.3: J1.28 v1(6.05,0)
AL2: C2.2 J1.34 R4.2 U1.9 | length 11.5
  Int2 w0.2: v2(4.875,5.45) 4.875,4.396 8.45,0.821 v1(8.45,0)
  Bottom Layer w0.2: R4.2 C2.2 v2(4.875,5.45) U1.9@4.875,6.35
  Bottom Layer w0.3: J1.34 v1(8.45,0)
AL4: C3.2 J1.32 R6.2 U1.11 | length 13.4
  Int2 w0.2: v2(2.335,5.45) 2.335,4.396 2.575,4.156 4.691,4.156 7.65,1.197 v1(7.65,0)
  Bottom Layer w0.2: R6.2 C3.2 v2(2.335,5.45) U1.11@2.335,6.35
  Bottom Layer w0.3: J1.32 v1(7.65,0)
AL5: C4.2 J1.30 R8.2 U1.13 | length 15.4
  Int2 w0.2: v2(-0.205,5.45) -0.205,4.396 0.335,3.856 4.566,3.856 6.85,1.572 v1(6.85,0)
  Bottom Layer w0.2: R8.2 C4.2 v2(-0.205,5.45) U1.13@-0.205,6.35
  Bottom Layer w0.3: J1.30 v1(6.85,0)
Analog_IR: C10.2 C13.2 R10.1 U2.29 | length 7.9
  Bottom Layer w0.2: U2.29 4.1,30.9 4.442,31.242 6.477,31.242 6.78,31.545 C13.2
  Bottom Layer w0.3: C13.2 R10.1
Analog_IR_: C7.2 R9.1 R10.2 R17.2 | length 2.9
  Bottom Layer w0.3: R10.2 R9.1
Analog_IS: C9.2 C12.2 R12.1 U2.30 | length 9.9
  Bottom Layer w0.2: U2.30 4.6,30.4 4.942,30.742 8.977,30.742 9.28,31.045 C12.2
  Bottom Layer w0.3: C12.2 C9.2 R12.1
Analog_IS_: C6.2 R11.1 R12.2 R16.2 | length 2.9
  Bottom Layer w0.3: R12.2 R11.1
Analog_IT: C8.2 C11.2 R14.1 U2.31 | length 11.9
  Bottom Layer w0.2: U2.31 5.1,29.9 5.442,30.242 11.477,30.242 11.78,30.545 C11.2
  Bottom Layer w0.3: C11.2 C8.2 R14.1
Analog_IT_: C5.2 R13.1 R14.2 R15.2 | length 2.9
  Bottom Layer w0.3: R14.2 R13.1
Analog_VR: C20.2 C23.2 R33.1 R38.2 U2.25 | length 11.4
  Bottom Layer w0.2: R38.2 -3.22,30.545 -2.917,30.242 1.758,30.242 2.1,29.9 U2.25
  Bottom Layer w0.3: R38.2 C20.2 C23.2 R33.1@-3.22,34.9
Analog_VS: C19.2 C22.2 R34.1 R37.2 U2.26 | length 9.4
  Bottom Layer w0.2: R37.2 -0.72,31.045 -0.417,30.742 2.258,30.742 2.6,30.4 U2.26
  Bottom Layer w0.3: R37.2 C19.2 C22.2 R34.1@-0.72,34.9
Analog_VT: C18.2 C21.2 R35.1 R36.2 U2.27 | length 7.4
  Bottom Layer w0.2: R36.2 1.78,31.545 2.083,31.242 2.758,31.242 3.1,30.9 U2.27
  Bottom Layer w0.3: R36.2 C18.2 C21.2 R35.1@1.78,34.9
GND: C1.1 C2.1 C3.1 C4.1 C24.1 C25.1 C28.1 C30.1 C31.1 C32.1 J1.15 J1.16 J1.17 J1.18 J1.23 J1.24 J1.41 J1.42 J1.45 J1.46 J1.51 J1.52 R2.1 R4.1 R6.1 R8.1 R41.1 R44.1 R46.1 R48.1 TR1.1 U3.8 U4.4 | length 40.8
  Top Layer w0.2: J1.41 11.43,-1.67 11.43,0.453
  Top Layer w0.3: -6.858,19.304 -6.858,26.924 -6.132,27.65 U3.8@-4.173,27.65
  Top Layer w0.4: U3.8@-4.173,27.65 -4.15,27.673 -4.15,29.047 R44.1
  Top Layer w0.5: J1.15 -2.35,0.426 ; J1.17 1.65,0.426 ; J1.23 4.05,0.426 ; J1.45 12.85,0.426 ; J1.51 15.25,0.426
  Bottom Layer w0.3: J1.16 -1.95,0.65 ; J1.18 2.05,0.65 ; J1.24 4.45,0.65 ; J1.42 11.65,0.65 ; J1.46 13.25,0.65 ; J1.52 15.65,0.65
  other v1: -10.301,2.54 -7.486,2.54 -1.301,2.54 1.699,2.54 4.699,2.54 7.699,2.54 16.699,2.54 -10.301,5.54 -7.486,5.54 13.699,5.54 16.699,5.54 -10.301,8.54 -7.486,8.54 -1.301,8.54 1.699,8.54 4.699,8.54 10.699,8.54 13.699,8.54 16.699,8.54
GNDISO: C14.1 C15.1 C16.1 C17.1 C26.1 C27.1 C29.1 C33.1 R25.1 R39.1 TR1.4 U1.2 U1.4 U1.6 U1.8 U2.1 U2.14 U2.15 U3.9 U4.5 X1.2 X1.4 | length 24
  Top Layer w0.2: v1(-6,12.81) C26.1 C27.1 ; v1(-5,23) -4.992,22.992 -4.45,22.992 -4.173,22.715 U3.9@-4.173,21.35 ; v1(-2.903,18.5) C29.1 ; R39.1 v1(12.5,20.3)
  Top Layer w0.5: v1(6.477,12.065) 6.477,12.319 6.968,12.81 TR1.4@8.9,12.81
  Bottom Layer w0.2: v2(-4.7,27.75) R25.1 ; C14.1 C15.1 v2(-2.5,21.75) ; U1.2 v2(-2.745,14.07) ; U1.4 v2(-0.205,14.07) ; C16.1 2.18,18.57 X1.2 v2(2.3,17.85) ; U1.6 v2(2.335,14.07) ; U2.15 U2.14 v2(3.1,22.6) ; X1.4 3.82,19.43 C17.1 v2(4.6,20.15) ; U1.8 v2(4.875,14.07) ; U2.1 v2(7.25,27.75) ; U4.5 v2(7.905,14.07) ; v2(10.445,14.93) C33.1
I\S\O\_\A\L\1\: R1.2 R24.1 U2.20 | length 17.9
  Int2 w0.2: v2(-2.745,14.93) -2.215,14.93 -1.651,15.494 -1.651,24.901 v2(-2.5,25.75)
  Bottom Layer w0.2: R1.2 v2(-2.745,14.93) ; R24.1 v2(-2.5,25.75) U2.20
I\S\O\_\A\L\1\_\: R1.1 U1.1 | length 0.9
  Bottom Layer w0.2: U1.1 R1.1
I\S\O\_\A\L\2\: R3.2 R23.1 U2.9 | length 11.8
  Int2 w0.2: v2(4.875,14.93) 5.715,15.77 5.715,19.265 v2(6.6,20.15)
  Bottom Layer w0.2: R3.2 v2(4.875,14.93) ; U2.9 5.6,22.1 6.6,21.1 R23.1
I\S\O\_\A\L\2\_\: R3.1 U1.7 | length 0.9
  Bottom Layer w0.2: U1.7 R3.1
I\S\O\_\A\L\4\: R5.2 R22.1 U2.4 | length 22.9
  Int2 w0.2: v2(2.335,14.93) 4.135,14.93 5.415,16.21 5.415,19.639 8.128,22.352 8.128,25.781 9.097,26.75 v2(10.2,26.75)
  Bottom Layer w0.2: R5.2 v2(2.335,14.93) ; U2.4 8.75,26.25 9.25,26.75 R22.1
I\S\O\_\A\L\4\_\: R5.1 U1.5 | length 0.9
  Bottom Layer w0.2: U1.5 R5.1
I\S\O\_\A\L\5\: R7.2 R21.1 U2.21 | length 19.2
  Int2 w0.2: v2(-2.5,26.75) -1.27,25.52 -1.27,15.494 -0.706,14.93 v2(-0.205,14.93)
  Bottom Layer w0.2: R21.1 -1.55,26.75 -1.05,26.25 U2.21 ; R7.2 v2(-0.205,14.93)
I\S\O\_\A\L\5\_\: R7.1 U1.3 | length 0.9
  Bottom Layer w0.2: U1.3 R7.1
I\S\O\_\D\I\O\1\1\: R27.2 U2.19 | length 4.9
  Bottom Layer w0.2: R27.2 -1.55,24.75 -1.05,25.25 U2.19
I\S\O\_\D\I\O\1\2\: R28.2 U2.10 | length 4.4
  Bottom Layer w0.2: U2.10 5.1,21.6 5.6,21.1 R28.2
I\S\O\_\D\I\O\1\3\: R29.2 U2.7 | length 5.1
  Bottom Layer w0.2: U2.7 8.25,24.75 9.25,23.75 R29.2
I\S\O\_\D\I\O\1\4\: R31.2 U2.5 | length 4.7
  Bottom Layer w0.2: U2.5 R31.2
I\S\O\_\D\I\O\1\5\: R32.2 U2.2 | length 5.3
  Bottom Layer w0.2: U2.2 7.75,27.25 9.25,28.75 R32.2
I\S\O\_\D\I\O\5\: R26.2 U2.8 | length 5.3
  Bottom Layer w0.2: U2.8 7.75,24.25 ; 7.75,24.25 9.25,22.75 R26.2
I\S\O\_\R\E\S\E\T\: C29.2 R42.1 U2.23 U3.10 | length 15.6
  Top Layer w0.2: R42.1 C29.2 -2.903,21.35 v1(-2.903,23)
  Int2 w0.2: v1(-2.903,23) -3.315,23 -3.556,23.241 -3.556,27.94 -2.921,28.575 -1.524,28.575 -0.199,27.25 v2(0.45,27.25)
  Bottom Layer w0.2: v2(0.45,27.25) U2.23
IFC0: R18.1 U2.3 | length 5.1
  Bottom Layer w0.2: U2.3@6.25,26.75 8.25,26.75 9.25,27.75 R18.1
IFC1: R25.2 U2.22 | length 5.1
  Bottom Layer w0.2: R25.2 -1.55,27.75 -0.55,26.75 U2.22@1.45,26.75
IR: J2.3 R9.2 | length 2.3
  Bottom Layer w0.4: J2.3 6.35,37.846 6.764,37.432 6.764,36.92 R9.2
IS: J2.2 R11.2 | length 2.3
  Bottom Layer w0.4: J2.2 8.85,37.846 9.264,37.432 9.264,36.92 R11.2
ISO_UART_RX: U2.17 U4.6 | length 23.4
  Int2 w0.2: v2(0.45,24.25) 0.45,13.681 1.177,12.954 8.89,12.954 9.175,13.239 v2(9.175,14.07)
  Bottom Layer w0.2: v2(0.45,24.25) U2.17 ; U4.6 v2(9.175,14.07)
ISO_UART_TX: U2.16 U4.7 | length 23.4
  Int2 w0.2: v2(2.1,22.6) 2.1,21.912 0.75,20.562 0.75,13.806 1.302,13.254 8.255,13.254 8.509,13.508 8.509,14.317 8.847,14.655 9.86,14.655 v2(10.445,14.07)
  Bottom Layer w0.2: v2(2.1,22.6) U2.16 ; U4.7 v2(10.445,14.07)
IT: J2.1 R13.2 | length 2.3
  Bottom Layer w0.4: J2.1 11.35,37.846 11.764,37.432 11.764,36.92 R13.2
NetD1_1: D1.1 R39.2 | length 1.1
  Top Layer w0.2: D1.1 R39.2
NOTR: C5.1 C6.1 C7.1 C8.1 C9.1 C10.1 C11.1 C12.1 C13.1 C18.1 C19.1 C20.1 C21.1 C22.1 C23.1 D2.2 D3.2 D4.2 J2.4 R15.1 R16.1 R17.1 R30.1 R36.1 R37.1 R38.1 U2.11 U2.24 U2.28 U2.32 U3.2 U3.4 U3.6 | length 31.8
  Top Layer w0.2: v3(-1.633,26.75) U3.6@-1.633,27.65 ; v3(0.907,26.75) U3.4@0.907,27.65 ; v3(3.447,26.75) U3.2@3.447,27.65
  Top Layer w0.3: v1(-5,32.5) D2.2 ; v1(2.5,32.45) 3.4,32.45 D3.2 ; v1(10.106,32.5) D4.2 D4.2@11.006,32.45
  Int1 w0.2: v3(-1.633,26.75) -0.664,25.781 0.907,25.781 ; v3(0.907,26.75) 0.907,25.781 ; v3@0.92,26.763 v1(0.92,31.38) ; v3(3.447,26.75) 2.478,25.781 0.907,25.781
  Int2 w1: 3.85,34.377 J2.4
  Bottom Layer w0.2: v1(-1.58,31.38) R37.1 ; v1(0.92,31.38) R36.1
  Bottom Layer w0.3: C7.1 R17.1 ; C6.1 R16.1 ; C5.1 R15.1
  Bottom Layer w0.4: R38.1 C20.1 C23.1 ; R37.1 C19.1 C22.1 ; R36.1 C18.1 C21.1
  other v1: 8.42,31.38 10.92,31.38
RESET: J1.26 R43.2 R44.2 | length 47.2
  Top Layer w0.2: R44.2 v3(-3.538,29.93) R43.2
  Int1 w0.2: v3(-3.538,29.93) -6.265,29.93 -6.731,29.464 -6.731,2.286 -6.096,1.651 4.572,1.651 5.25,0.973 v1(5.25,0)
  Bottom Layer w0.3: J1.26 v1(5.25,0)
RESET_: R43.1 U3.7 | length 1.4
  Top Layer w0.2: U3.7@-2.903,27.65 R43.1
SENSE_VR: C28.2 J1.36 R41.2 U3.11 | length 43.8
  Top Layer w0.2: U3.11@-1.633,21.35 C28.2 R41.2
  Int1 w0.2: v3(-1.651,20.447) -1.651,19.812 -0.97,19.131 2.162,19.131 2.822,18.47 2.822,17.073 4.113,15.783 13.975,15.783 15.148,14.61 15.148,3.678 14.437,2.967 11.389,2.967 9.25,0.828 v1(9.25,0)
  Bottom Layer w0.3: J1.36 v1(9.25,0)
SENSE_VS: C30.2 J1.38 R46.2 U3.13 | length 41.5
  Top Layer w0.2: v3(0.9,20.458) 0.904,20.455 0.904,19.933 C30.2 R46.2 ; v3@0.907,20.458 U3.13@0.907,21.35
  Int1 w0.2: v3(0.9,20.458) 0.9,19.674 1.143,19.431 2.286,19.431 3.122,18.595 3.122,17.198 4.237,16.083 14.1,16.083 15.448,14.735 15.448,3.553 14.562,2.667 11.514,2.667 10.05,1.203 v1(10.05,0)
  Bottom Layer w0.3: J1.38 v1(10.05,0)
SENSE_VT: C31.2 J1.40 R48.2 U3.15 | length 39.7
  Top Layer w0.2: U3.15@3.447,21.35 C31.2 R48.2
  Int1 w0.2: v3(3.429,20.447) 3.429,17.315 4.361,16.383 14.224,16.383 15.748,14.859 15.748,3.429 14.686,2.367 11.638,2.367 10.85,1.579 v1(10.85,0)
  Bottom Layer w0.3: J1.40 v1(10.85,0)
VR: J2.7 R33.2 R40.2 | length 7.4
  Top Layer w0.5: R40.2@-4.6,34 -4.6,35.55 -3.65,36.5 J2.7
  Bottom Layer w0.5: R33.2@-3.65,36.95 J2.7
VR_OPTO: D2.1 R40.1 U3.5 | length 10.1
  Top Layer w0.2: v3(-0.363,26.75) U3.5@-0.363,27.65
  Top Layer w0.4: D2.1 v3(-2.7,32.5) R40.1@-2.7,34
  Int1 w0.3: v3(-2.7,32.5) -2.7,30.894 -1.778,29.972 -0.889,29.972 -0.363,29.446 v3(-0.363,26.75)
VS: J2.6 R34.2 R45.2 | length 9.7
  Top Layer w0.5: J2.6 -1.15,36.456 1.306,34 R45.2@2.9,34
  Bottom Layer w0.5: R34.2@-1.15,36.95 J2.6
VS_OPTO: D3.1 R45.1 U3.3 | length 10.4
  Top Layer w0.2: v3(2.177,26.75) U3.3@2.177,27.65
  Top Layer w0.4: D3.1 v3(4.8,32.5) R45.1@4.8,34
  Int1 w0.3: v3(2.177,26.75) 2.177,29.355 2.794,29.972 3.937,29.972 4.8,30.835 v3(4.8,32.5)
VT: J2.5 R35.2 R47.2 | length 14.4
  Top Layer w0.5: J2.5 1.35,37.004 2.032,36.322 6.35,36.322 8.672,34 R47.2@10.506,34
  Bottom Layer w0.5: R35.2@1.35,36.95 J2.5
VT_OPTO: D4.1 R47.1 U3.1 | length 15.2
  Top Layer w0.2: v3(4.717,26.75) U3.1@4.717,27.65
  Top Layer w0.4: D4.1 v3(12.406,32.5) R47.1@12.406,34
  Int1 w0.3: v3(4.717,26.75) 4.717,28.847 5.842,29.972 11.557,29.972 12.406,30.821 v3(12.406,32.5)
XIN: C17.2 U2.12 X1.1 | length 6.8
  Bottom Layer w0.2: X1.1 3.65,18.45 3.191,18.909 3.189,18.909 3.048,19.05 3.048,20.701 4.1,21.753 U2.12 ; X1.1@3.76,18.51 C17.2@4.54,18.51
  Bottom Layer w0.3: X1.1 X1.1@3.76,18.51 ; C17.2@4.54,18.51 C17.2
XOUT: C16.2 U2.13 X1.3 | length 5.6
  Bottom Layer w0.2: C16.2@1.46,19.49 X1.3@2.24,19.49 ; X1.3 2.34,19.55 2.54,19.75 2.54,20.955 3.6,22.015 U2.13
  Bottom Layer w0.3: C16.2 C16.2@1.46,19.49 ; X1.3@2.24,19.49 X1.3
pads on no net: J1.1 J1.2 J1.3 J1.4 J1.5 J1.6 J1.9 J1.10 J1.11 J1.12 J1.13 J1.14 J1.19 J1.21 J1.25 J1.27 J1.29 J1.31 J1.33 J1.35 J1.37 J1.39 J1.43 J1.44 J1.47 J1.48 J1.49 J1.50 TR1.8 U2.EP

## Polygon pours and split planes (outlines as drawn)
NOTR on Int2 "NOTR_L03_P005" (solid, pour order 5): -6.223,35.052 13.97,35.052 13.97,30.988 -6.223,30.988
GNDISO on Int2 "GNDISO_L03_P000" (solid, pour order 0): -6.223,30 -6.223,11 13.843,11 13.843,30
NOTR on Bottom Layer "Bottom NOTR" (solid, pour order 1): -6.223,35.433 -6.223,17 13.843,17 13.843,35.433
GND on Bottom Layer "Bottom GND" (solid, remove dead copper, pour order 2): -9,-3.25 -9,-0.85 ccw(c-9.8,-0.85) -9.8,-0.05 -11.15,-0.05 -11.15,10 18.85,10 18.85,-0.05 17.5,-0.05 ccw(c17.5,-0.85) 16.7,-0.85 16.7,-3.25 0.75,-3.25 0.75,0 ccw(c0,0) -0.75,0 -0.75,-3.25
GND on Top Layer "Bottom GND" (solid, remove dead copper, pour order 3): -9,-3.25 -9,-0.85 ccw(c-9.8,-0.85) -9.8,-0.05 -11.15,-0.05 -11.15,19.589 18.85,19.589 18.85,-0.05 17.5,-0.05 ccw(c17.5,-0.85) 16.7,-0.85 16.7,-3.25 0.75,-3.25 0.75,0 ccw(c0,0) -0.75,0 -0.75,-3.25
GND on Int1 "Bottom GND" (solid, remove dead copper, pour order 6): -9,-3.25 -9,-0.85 ccw(c-9.8,-0.85) -9.8,-0.05 -11.15,-0.05 -11.15,24.257 18.85,24.257 18.85,-0.05 17.5,-0.05 ccw(c17.5,-0.85) 16.7,-0.85 16.7,-3.25 0.75,-3.25 0.75,0 ccw(c0,0) -0.75,0 -0.75,-3.25

## Other copper
Top Layer:
  text "B202AA" at -9.858,39.011 h1
  text "MGA" at 14.964,39.007 h1

## Silkscreen, mask and mechanical layers (free items; w line width, h text height)
Top Overlay:
  drawing of 224 lines, arcs and shapes, not listed
  text "PHASE R" at -2.9,41.1 h0.8 r90
  text "PHASE S" at -0.4,41.1 h0.8 r90
  text "PHASE T" at 2.1,41.1 h0.8 r90
  text "NOTR" at 4.6,41.1 h0.8 r90
  text "CURRENT R" at 7.1,41.1 h0.8 r90
  text "CURRENT S" at 9.6,41.1 h0.8 r90
  text "CURRENT T" at 12.1,41.1 h0.8 r90
  text "DANGER HIGH VOLTAGE" at 14.7,35.083 h1 r270
  text "PHASE R" at -6.256,35 h0.8
  text "PHASE S" at 1.35,35 h0.8
  text "PHASE T" at 8.956,35 h0.8
  text "B202AA" at 7.566,28.47 h0.8
  text "H" at 7.515,21.734 h7
  text "POWER" at 7.566,18.046 h0.8
  text "DANGER HIGH VOLTAGE" at -7,7.083 h1 r90
Bottom Overlay:
  drawing of 213 lines, arcs and shapes, not listed
  text "PHASE R" at -4.4,41.1 h0.8 r270
  text "PHASE S" at -1.9,41.1 h0.8 r270
  text "PHASE T" at 0.6,41.1 h0.8 r270
  text "NOTR" at 3.1,41.1 h0.8 r270
  text "CURRENT R" at 5.6,41.1 h0.8 r270
  text "CURRENT S" at 8.1,41.1 h0.8 r270
  text "CURRENT T" at 10.6,41.1 h0.8 r270
  text "DANGER HIGH VOLTAGE" at -7,35.083 h1 r90
  text "DANGER HIGH VOLTAGE" at 14.6,7.083 h1 r270
Top Solder:
  drawing of 2 lines, arcs and shapes, not listed
Bottom Solder:
  drawing of 2 lines, arcs and shapes, not listed
Board Shape:
  the board outline again, w0.1

## Text inside footprints (layer, text, board x,y; h text height)
J1: Top Overlay "51" at 15.407,0 h0.6 r90; Top Overlay "17" at 1.811,0 h0.6 r90; Top Overlay "15" at -2.193,0 h0.6 r90; Top Overlay "1" at -7.789,0 h0.6 r90